# EAGLE board hub75-Adapter mkii (EAGLE 9.6.0)
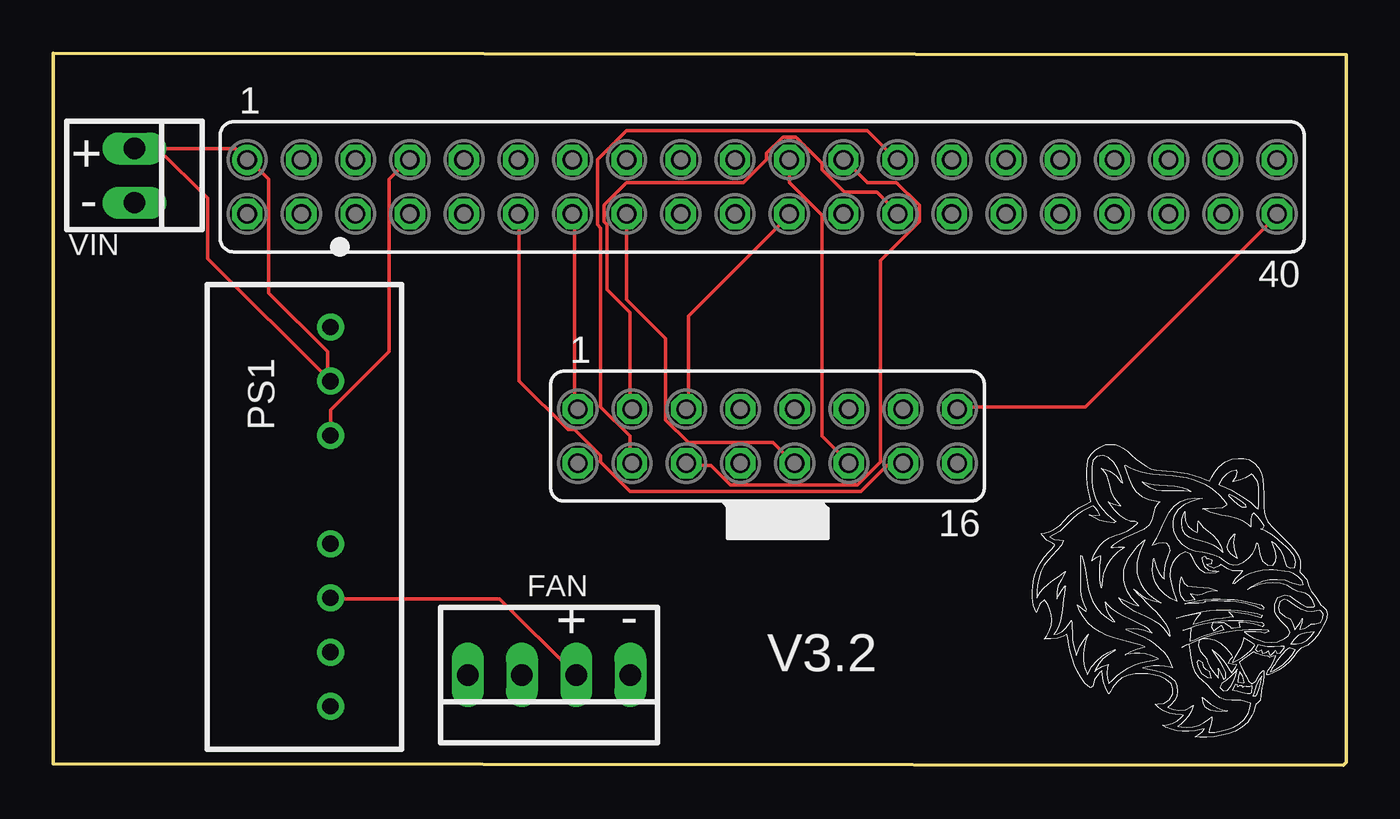
[diagram p0: board, top side]
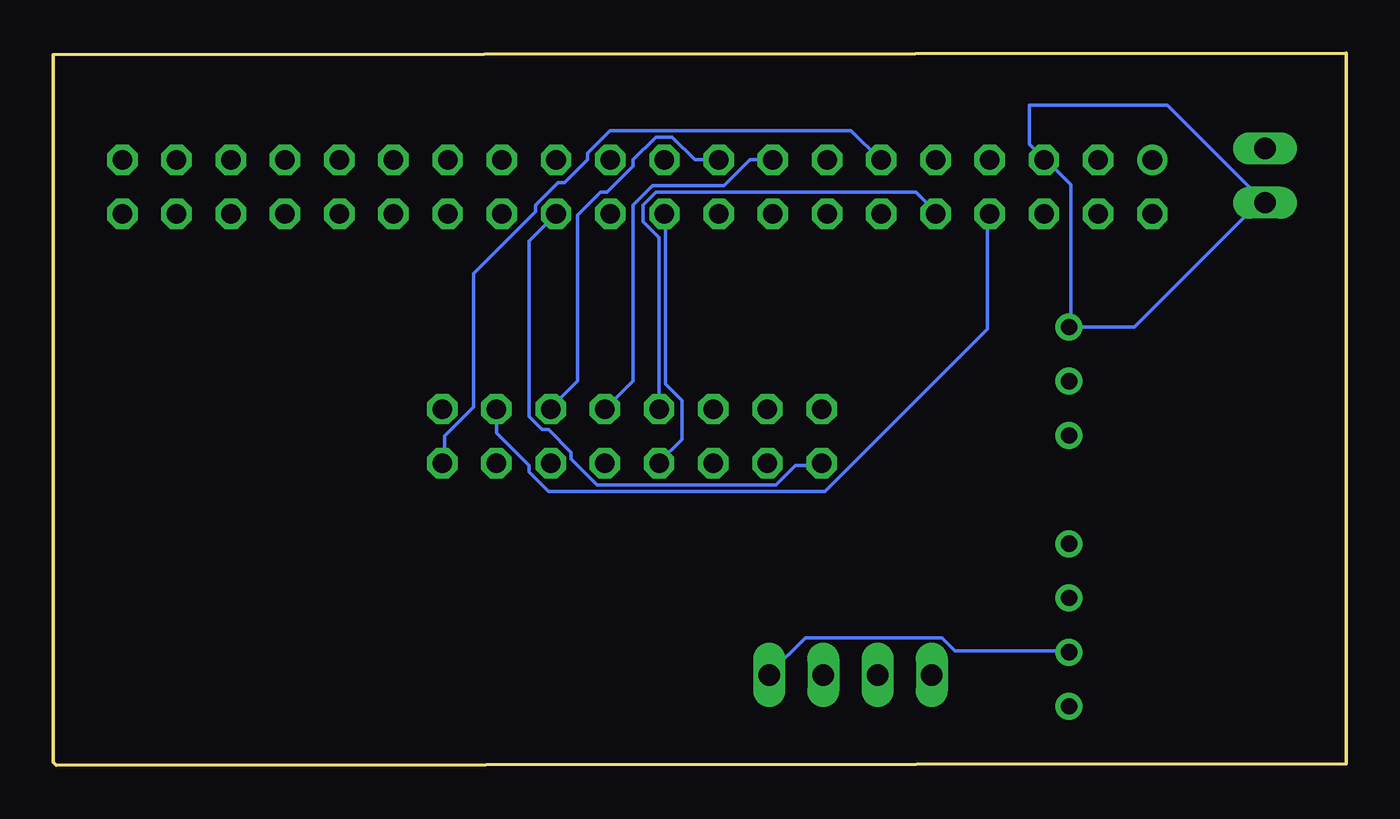
[diagram p1: board, bottom side, seen from below]

Size 60.58 x 33.37 mm. Coordinates in mm from the lower left corner, seen from the top.
Outline: 0,0.06 0,33.37 60.58,33.31 60.58,0.13 60.44,0 0,0.06
Copper layers (1*16): Top 0.035mm / dielectric 1.5mm / Bottom 0.035mm
Design rules "default": minimum track width 6mil, minimum drill 0.35mm, track to track 6mil, track to pad 6mil, pad to pad 6mil, via to via 6mil, smd to smd 6mil, copper to edge 40mil, drill to drill 6mil, minimum pad ring 10mil, minimum via ring 8mil, stop-mask expansion 4mil, vias tented up to drill 0mil, thermal gap 10mil

## Footprints (pad centres in the part's own frame; a part is rotated, then mirrored left to right if it is on the bottom)
22-23-2041 = drill 1 long: 1 -3.81,0; 2 -1.27,0; 3 1.27,0; 4 3.81,0
TMR-6 = drill 0.76 pad 1.26: 1 -5.08,0; 2 -2.54,0; 3 0,0; 5 5.08,0; 6 7.62,0; 7 10.16,0; 8 12.7,0
FE08-2 = drill 0.914 octagon: 1 -8.89,1.27; 2 -8.89,-1.27; 3 -6.35,1.27; 4 -6.35,-1.27; 5 -3.81,1.27; 6 -3.81,-1.27; 7 -1.27,1.27; 8 -1.27,-1.27; 9 1.27,1.27; 10 1.27,-1.27; 11 3.81,1.27; 12 3.81,-1.27; 13 6.35,1.27; 14 6.35,-1.27; 15 8.89,1.27; 16 8.89,-1.27
FE20-2 = drill 0.914: 1 -24.13,1.27 | drill 0.914 octagon: 2 -24.13,-1.27; 3 -21.59,1.27; 4 -21.59,-1.27; 5 -19.05,1.27; 6 -19.05,-1.27; 7 -16.51,1.27; 8 -16.51,-1.27; 9 -13.97,1.27; 10 -13.97,-1.27; 11 -11.43,1.27; 12 -11.43,-1.27; 13 -8.89,1.27; 14 -8.89,-1.27; 15 -6.35,1.27; 16 -6.35,-1.27; 17 -3.81,1.27; 18 -3.81,-1.27; 19 -1.27,1.27; 20 -1.27,-1.27; 21 1.27,1.27; 22 1.27,-1.27; 23 3.81,1.27; 24 3.81,-1.27; 25 6.35,1.27; 26 6.35,-1.27; 27 8.89,1.27; 28 8.89,-1.27; 29 11.43,1.27; 30 11.43,-1.27; 31 13.97,1.27; 32 13.97,-1.27; 33 16.51,1.27; 34 16.51,-1.27; 35 19.05,1.27; 36 19.05,-1.27; 37 21.59,1.27; 38 21.59,-1.27; 39 24.13,1.27; 40 24.13,-1.27
22-23-2021 = drill 1 long: 1 -1.27,0; 2 1.27,0

## Placement (x,y rotation side)
FAN  22-23-2041  [22-23-2041]  23.23,4.23 180 top
PS1  TMR_6-0512  [TMR-6]  12.98,15.46 270 top
SV1  [FE08-2]  33.47,15.43 0 top
SV2  [FE20-2]  33.21,27.11 0 top
VIN  22-23-2021  [22-23-2021]  3.81,27.64 270 top

## Library data of the parts
FAN = con-molex; MF: MOLEX; MPN: 22-23-2041; OC_FARNELL: 1462920; OC_NEWARK: 38C0355
PS1 = TMR_6-0512; DESCRIPTION: 6 Watt DC/DC converter, industrial, 2:1 input, regulated, 1600 VDC I/O-isolation, encapsulated, SIP-8; HEIGHT: mm; MANUFACTURER_NAME: Traco Power; MANUFACTURER_PART_NUMBER: TMR 6-0512; MOUSER_PART_NUMBER: 495-TMR-6-0512; MOUSER_PRICE-STOCK: https://www.mouser.co.uk/ProductDetail/TRACO-Power/TMR-6-0512/?qs=ckJk83FOD0Xq8aDSZctxXw%3D%3D
SV1 SV2 = con-lsta; OC_FARNELL: unknown; OC_NEWARK: unknown
VIN = con-molex; MF: MOLEX; MPN: 22-23-2021; OC_FARNELL: 1462926; OC_NEWARK: 25C3832

## Nets
N$1: SV1.1 SV2.14
N$2: SV1.3 SV2.26
N$3: SV1.5 SV2.22
N$4: SV1.7 SV2.10
N$5: SV1.9 SV2.15
N$6: SV1.11 SV2.17
N$7: SV1.13 SV2.8
N$8: SV1.15 SV2.40
N$9: SV1.2 SV2.24
N$10: SV1.4 SV2.25
N$11: SV1.6 SV2.23
N$12: SV1.8 SV2.20
N$13: SV1.10 SV2.16
N$14: PS1.3 SV2.7
N$15: SV1.12 SV2.21
N$16: SV1.14 SV2.12
N$17: PS1.2 SV2.1 VIN.1
N$18: FAN.1 PS1.7
N$19: SV1.16 SV2.11
N$20: FAN.2 PS1.6
N$21: PS1.1 SV2.5 VIN.2

## Tracks (layer width: path | path; a pad name or v marks a point on that pad's centre or on a via)
N$1
  Top 0.152: SV2.14 24.42,25.79 24.42,16.95 24.58,16.8 SV1.1
N$2
  Top 0.152: SV1.3 27.01,16.8 27.01,21.22 25.95,22.29 25.95,25.33 25.79,25.48 25.79,26.25 26.86,27.31 32.35,27.31 33.42,28.38 33.42,28.69 34.18,29.45 34.79,29.45 36.01,28.23 36.01,27.92 37.07,26.86 38.6,26.86 39.51,25.94 SV2.26
N$3
  Top 0.152: SV1.5 29.76,16.8 29.76,21.07 34.48,25.79 SV2.22
N$4
  Bottom 0.152: SV1.7 32.2,24.72 32.96,25.48 32.96,26.25 32.35,26.86 20.16,26.86 19.24,25.94 SV2.10
N$5
  Bottom 0.152: SV2.15 27.93,28.38 29.15,27.16 32.5,27.16 33.42,26.25 33.42,18.02 SV1.9
N$6
  Bottom 0.152: SV2.17 30.52,28.38 31.59,29.45 32.35,29.45 33.42,28.38 33.42,28.08 34.63,26.86 34.94,26.86 36.01,25.79 36.01,18.02 37.22,16.8 SV1.11
N$7
  Bottom 0.152: SV1.13 39.82,15.58 38.29,14.05 38.29,13.75 37.38,12.84 24.42,12.84 16.8,20.46 16.8,25.79 SV2.8
N$8
  Top 0.152: SV1.15 42.41,16.8 48.35,16.8 57.34,25.79 SV2.40
N$9
  Bottom 0.152: SV2.24 38.29,24.57 38.29,16.34 37.68,15.73 37.38,15.73 36.31,14.67 36.31,14.36 35.09,13.14 26.71,13.14 25.79,14.05 24.58,14.05 SV1.2
N$10
  Top 0.152: SV1.4 27.01,14.21 27.01,15.43 25.64,16.8 25.64,25.18 25.49,25.33 25.49,28.38 26.86,29.75 38.14,29.75 39.51,28.38 SV2.25
N$11
  Top 0.152: SV1.6 29.76,14.05 30.82,14.05 31.74,13.14 37.68,13.14 38.75,14.21 38.75,23.66 40.58,25.48 40.58,26.25 39.51,27.31 38.14,27.31 37.07,28.38 SV2.23
N$12
  Bottom 0.152: SV2.20 31.89,25.79 31.89,17.87 31.13,17.1 31.13,15.28 32.2,14.21 SV1.8
N$13
  Top 0.152: SV2.16 26.86,21.83 28.69,20 28.69,16.19 29.76,15.12 33.72,15.12 34.63,14.21 SV1.10
N$14
  Top 0.152: PS1.3 12.99,15.58 12.99,16.65 15.74,19.39 15.74,27.47 16.65,28.38 SV2.7
N$15
  Top 0.152: SV2.21 34.48,27.31 36.01,25.79 36.01,15.43 SV1.12
N$16
  Top 0.152: SV1.14 39.82,14.05 39.05,14.05 37.83,12.84 27.01,12.84 25.64,14.21 25.64,14.51 24.42,15.73 24.12,15.73 21.83,18.02 21.83,25.79 SV2.12
N$17
  Top 0.152: 9.03,28.38 SV2.1 | SV2.1 9.18,28.38 10.1,27.47 10.1,22.13 12.84,19.39 12.84,18.02 PS1.2 7.23,23.76 7.23,26.58 4.9,28.91 VIN.1 8.55,28.91 SV2.1
N$18
  Bottom 0.152: PS1.7 12.99,5.37 18.33,5.37 18.94,5.98 25.34,5.98 27.01,4.3 FAN.1
N$19
  Bottom 0.152: SV1.16 42.25,14.21 42.25,15.43 40.88,16.8 40.88,23.05 37.99,25.94 37.99,26.25 36.92,27.31 36.62,27.31 35.55,28.38 35.55,28.69 34.48,29.75 23.2,29.75 21.83,28.38 SV2.11
N$20
  Top 0.152: PS1.6 12.99,7.81 20.92,7.81 24.42,4.3 FAN.2
N$21  (via drill 0.35)
  Bottom 0.152: 14.11,28.38 14.06,28.38 12.9,27.22 12.9,20.71 v12.99,20.61 | SV2.5 14.11,28.33 14.05,28.33 14.11,28.38 | VIN.2 3.95,26.51 | 3.95,26.51 8.38,30.94 14.85,30.94 14.85,29.12 14.11,28.38 | PS1.1 9.92,20.54 3.95,26.51

## Text on the board
tPlace: V3.2
tNames: + | - | + | -